# Altium PCB uw_ipmc_zynq.PcbDoc (part 2 of 3)
Units mil, origin at the board's own origin, x right, y up, seen from the top; angles counter-clockwise.
Board outline 3228.35 x 1181.1 mil, 10 copper layers (Component Side, Ground Plane 1 (GND), Inner Layer 1, Inner Layer 2, Power Plane 1, Power Plane 2, Inner Layer 3, Inner Layer 4, Power Plane 3, Solder Side), stack 39.78 mil thick; 400 components, 397 nets, 1698 pads, 375 vias.
Unrouted connection lines stored in the file: 685.
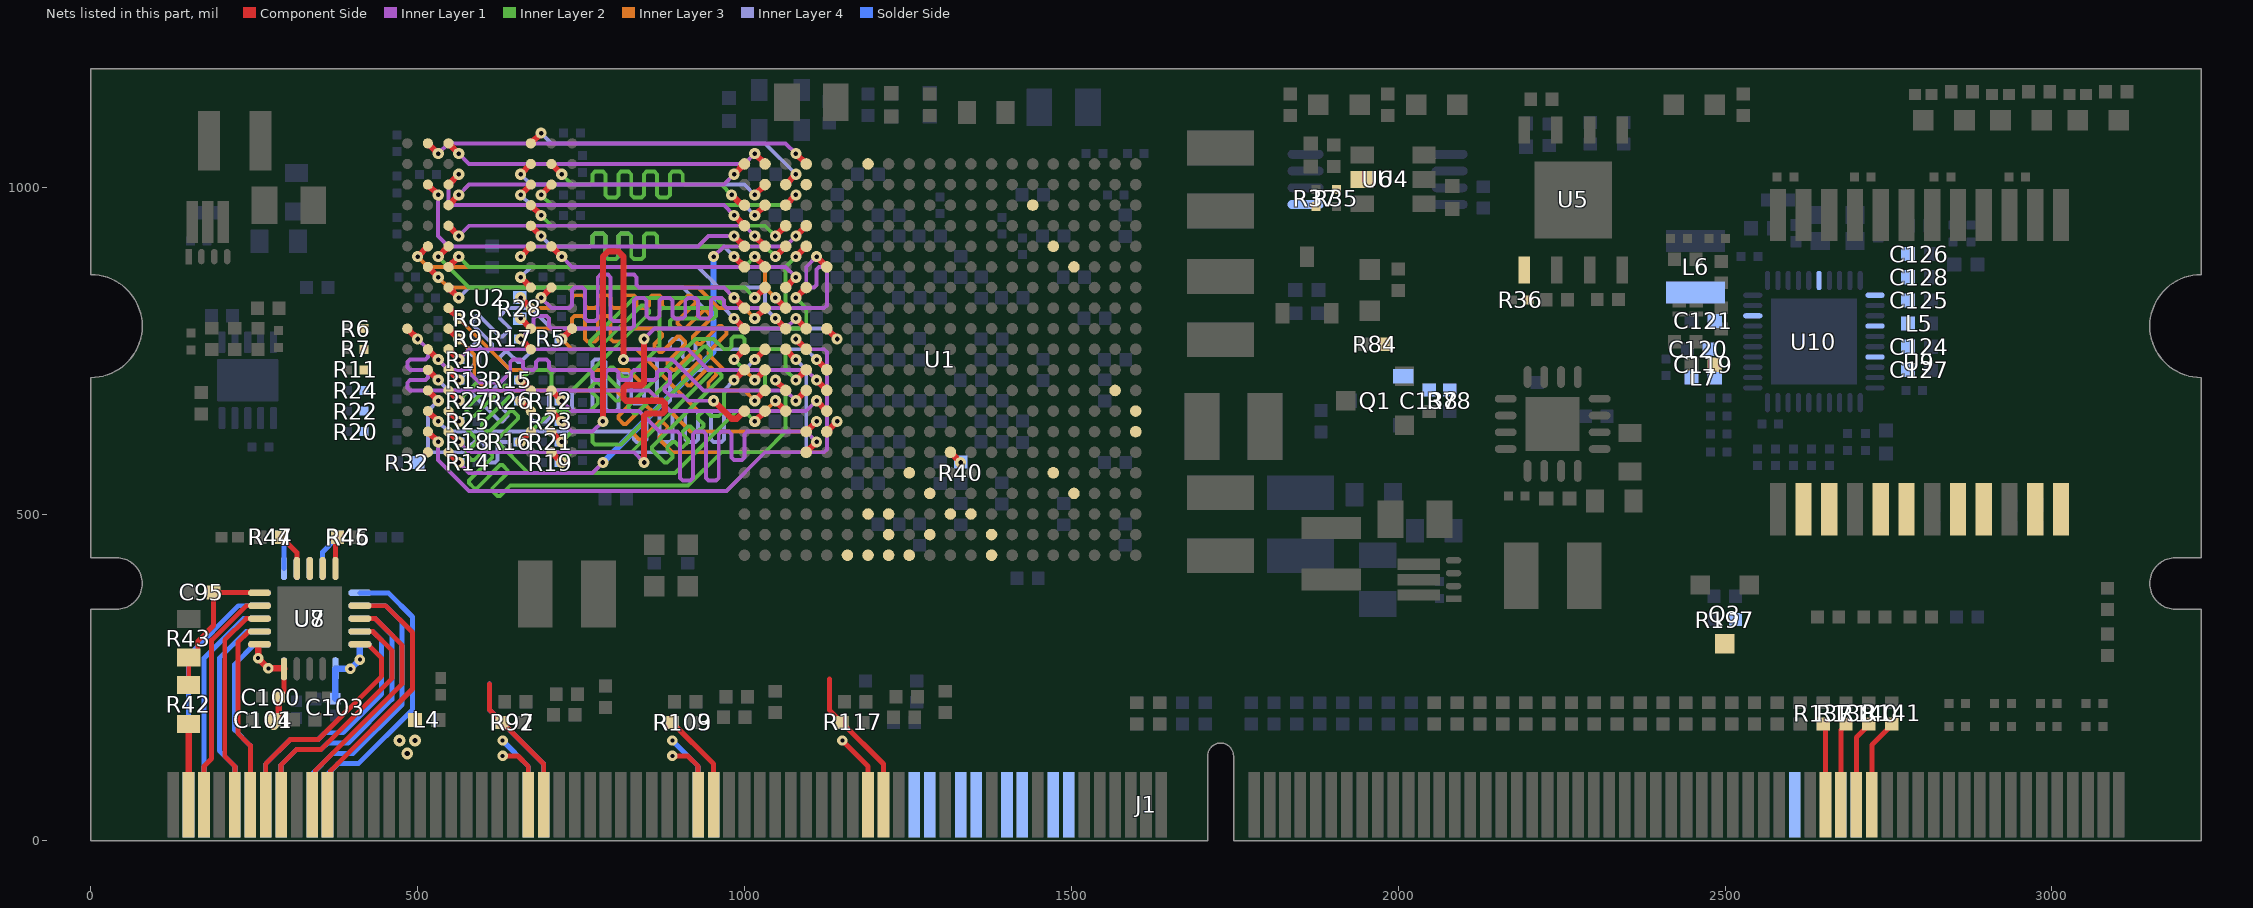
[diagram p10: the nets of this part, all layers, seen from the top]

## Footprints (in the part's own frame and the unit in brackets; to place one, negate y for a bottom-side part, rotate by r counter-clockwise, add the part's x,y. Pads: shape width x height; smd on the part's side, far side on the other; paste and mask are expansions set on the pad) (continued)
MINIDIMM244 [mm] "244-pin miniDIMM pads"
  rect 0.45x2.55 smd: 1(0,0) 2(0.6,0) 3(1.2,0) 4(1.8,0) 5(2.4,0) 6(3,0) 7(3.6,0) 8(4.2,0) 9(4.8,0) 10(5.4,0) 11(6,0) 12(6.6,0) 13(7.2,0) 14(7.8,0) 15(8.4,0) 16(9,0) 17(9.6,0) 18(10.2,0) 19(10.8,0) 20(11.4,0) 21(12,0) 22(12.6,0) 23(13.2,0) 24(13.8,0) 25(14.4,0) 26(15,0) 27(15.6,0) 28(16.2,0) 29(16.8,0) 30(17.4,0) 31(18,0) 32(18.6,0) 33(19.2,0) 34(19.8,0) 35(20.4,0) 36(21,0) 37(21.6,0) 38(22.2,0) 39(22.8,0) 40(23.4,0) 41(24,0) 42(24.6,0) 43(25.2,0) 44(25.8,0) 45(26.4,0) 46(27,0) 47(27.6,0) 48(28.2,0) 49(28.8,0) 50(29.4,0) 51(30,0) 52(30.6,0) 53(31.2,0) 54(31.8,0) 55(32.4,0) 56(33,0) 57(33.6,0) 58(34.2,0) 59(34.8,0) 60(35.4,0) 61(36,0) 62(36.6,0) 63(37.2,0) 64(37.8,0) 65(38.4,0) 66(42,0) 67(42.6,0) 68(43.2,0) 69(43.8,0) 70(44.4,0) 71(45,0) 72(45.6,0) 73(46.2,0) 74(46.8,0) 75(47.4,0) 76(48,0) 77(48.6,0) 78(49.2,0) 79(49.8,0) 80(50.4,0) 81(51,0) 82(51.6,0) 83(52.2,0) 84(52.8,0) 85(53.4,0) 86(54,0) 87(54.6,0) 88(55.2,0) 89(55.8,0) 90(56.4,0) 91(57,0) 92(57.6,0) 93(58.2,0) 94(58.8,0) 95(59.4,0) 96(60,0) 97(60.6,0) 98(61.2,0) 99(61.8,0) 100(62.4,0) 101(63,0) 102(63.6,0) 103(64.2,0) 104(64.8,0) 105(65.4,0) 106(66,0) 107(66.6,0) 108(67.2,0) 109(67.8,0) 110(68.4,0) 111(69,0) 112(69.6,0) 113(70.2,0) 114(70.8,0) 115(71.4,0) 116(72,0) 117(72.6,0) 118(73.2,0) 119(73.8,0) 120(74.4,0) 121(75,0) 122(75.6,0)
  rect 0.45x2.55 smd far side: 123(0,0) 124(0.6,0) 125(1.2,0) 126(1.8,0) 127(2.4,0) 128(3,0) 129(3.6,0) 130(4.2,0) 131(4.8,0) 132(5.4,0) 133(6,0) 134(6.6,0) 135(7.2,0) 136(7.8,0) 137(8.4,0) 138(9,0) 139(9.6,0) 140(10.2,0) 141(10.8,0) 142(11.4,0) 143(12,0) 144(12.6,0) 145(13.2,0) 146(13.8,0) 147(14.4,0) 148(15,0) 149(15.6,0) 150(16.2,0) 151(16.8,0) 152(17.4,0) 153(18,0) 154(18.6,0) 155(19.2,0) 156(19.8,0) 157(20.4,0) 158(21,0) 159(21.6,0) 160(22.2,0) 161(22.8,0) 162(23.4,0) 163(24,0) 164(24.6,0) 165(25.2,0) 166(25.8,0) 167(26.4,0) 168(27,0) 169(27.6,0) 170(28.2,0) 171(28.8,0) 172(29.4,0) 173(30,0) 174(30.6,0) 175(31.2,0) 176(31.8,0) 177(32.4,0) 178(33,0) 179(33.6,0) 180(34.2,0) 181(34.8,0) 182(35.4,0) 183(36,0) 184(36.6,0) 185(37.2,0) 186(37.8,0) 187(38.4,0) 188(42,0) 189(42.6,0) 190(43.2,0) 191(43.8,0) 192(44.4,0) 193(45,0) 194(45.6,0) 195(46.2,0) 196(46.8,0) 197(47.4,0) 198(48,0) 199(48.6,0) 200(49.2,0) 201(49.8,0) 202(50.4,0) 203(51,0) 204(51.6,0) 205(52.2,0) 206(52.8,0) 207(53.4,0) 208(54,0) 209(54.6,0) 210(55.2,0) 211(55.8,0) 212(56.4,0) 213(57,0) 214(57.6,0) 215(58.2,0) 216(58.8,0) 217(59.4,0) 218(60,0) 219(60.6,0) 220(61.2,0) 221(61.8,0) 222(62.4,0) 223(63,0) 224(63.6,0) 225(64.2,0) 226(64.8,0) 227(65.4,0) 228(66,0) 229(66.6,0) 230(67.2,0) 231(67.8,0) 232(68.4,0) 233(69,0) 234(69.6,0) 235(70.2,0) 236(70.8,0) 237(71.4,0) 238(72,0) 239(72.6,0) 240(73.2,0) 241(73.8,0) 242(74.4,0) 243(75,0) 244(75.6,0)
QFN40_H [mm] "QFN, 40-Leads, Body 5.00x5.00mm, Pitch 0.40mm, Thermal Pad 3.33x3.33mm, IPC High Density"
  oval 0.75x0.2 smd: 1(-2.375,1.8) 2(-2.375,1.4) 3(-2.375,1) 4(-2.375,0.6) 5(-2.375,0.2) 6(-2.375,-0.2) 7(-2.375,-0.6) 8(-2.375,-1) 9(-2.375,-1.4) 10(-2.375,-1.8) 21(2.375,-1.8) 22(2.375,-1.4) 23(2.375,-1) 24(2.375,-0.6) 25(2.375,-0.2) 26(2.375,0.2) 27(2.375,0.6) 28(2.375,1) 29(2.375,1.4) 30(2.375,1.8)
  oval 0.2x0.75 smd: 11(-1.8,-2.375) 12(-1.4,-2.375) 13(-1,-2.375) 14(-0.6,-2.375) 15(-0.2,-2.375) 16(0.2,-2.375) 17(0.6,-2.375) 18(1,-2.375) 19(1.4,-2.375) 20(1.8,-2.375) 31(1.8,2.375) 32(1.4,2.375) 33(1,2.375) 34(0.6,2.375) 35(0.2,2.375) 36(-0.2,2.375) 37(-0.6,2.375) 38(-1,2.375) 39(-1.4,2.375) 40(-1.8,2.375)
  rect 3.33x3.33 smd: 41(0,0)
  silkscreen extent -3.47,-2.7 2.7,2.7, body extent -2.55,-2.55 2.55,2.55, height 0.8
R0201_IPC_H [mm] "Chip Resistor, 2-Leads, Body 0.60x0.30mm, IPC High Density"
  rect 0.35x0.35 smd: 1(-0.325,0) 2(0.325,0)
  body extent -0.32,-0.17 0.32,0.17, height 0.26
R0402_IPC_H [mm] "Chip Resistor, 2-Leads, Body 1.00x0.50mm, IPC High Density"
  rect 0.5x0.52 smd: 1(-0.415,0) 2(0.415,0)
  body extent -0.53,-0.28 0.53,0.28, height 0.4
R0603 [mm] "Chip Resistor, Body 1.6x0.8mm, IPC High Density"
  rect 0.7x0.9 smd: 1(-0.75,0) 2(0.75,0)
  silkscreen extent -0.2,-0.35 0.2,0.35, body extent -0.85,-0.48 0.85,0.48, height 0.9
SOT23-H [mm] "SOT23, 3-Leads, Body 2.90x2.45mm, Pitch 0.95mm, IPC High Density"
  rect 0.8x0.55 smd: 1(-1.1,0.95) 2(-1.1,-0.95) 3(1.1,0)
  silkscreen extent -1.23,-1.5 0.7,1.9, body extent -0.7,-1.5 0.7,1.5, height 1.1
SOT-23-OT6_L [mm] "SOT23, 6-Leads, Body 2.9x1.7mm, Pitch 0.95mm, Lead Span 2.8mm, IPC High Density"
  rect 0.9x0.65 smd: 1(-1.2,0.95) 2(-1.2,0) 3(-1.2,-0.95) 4(1.2,-0.95) 5(1.2,0) 6(1.2,0.95)
  silkscreen extent -1.33,-1.55 0.35,1.95, body extent -0.9,-1.55 0.9,1.55, height 1.45
SSOT-3_H [mm] "SOT23, 3-Leads, Body 2.92x2.51mm, Pitch 0.95mm, IPC High Density"
  rect 0.75x0.75 smd: 1(-1.145,0.95) 2(-1.145,-0.95) 3(1.145,0)
  silkscreen extent -1.27,-1.55 0.74,2, body extent -0.74,-1.52 0.74,1.53, height 0.93
TSSOP-ST8_L [mm] "TSOP, 8-Leads, Body 3x4.4mm, Pitch 0.65mm, IPC High Density"
  oval 1.4x0.35 smd: 1(-2.8,0.975) 2(-2.8,0.325) 3(-2.8,-0.325) 4(-2.8,-0.975) 5(2.8,-0.975) 6(2.8,-0.325) 7(2.8,0.325) 8(2.8,0.975)
  silkscreen extent -2.92,-1.55 1.7,1.82, body extent -2.25,-1.55 2.25,1.55, height 1.2
V-PDFN-8_H [mm] "SON, 8-Leads, Body 5.00x6.00mm, Pitch 1.27mm, Thermal Pad 3.00x3.00mm, IPC High Density"
  rect 1.05x0.45 smd: 1(-2.72,1.905) 2(-2.72,0.635) 3(-2.72,-0.635) 4(-2.72,-1.905) 5(2.72,-1.905) 6(2.72,-0.635) 7(2.72,0.635) 8(2.72,1.905)
  rect 3x3 smd paste-1.5: 9(0,0)
  silkscreen extent -3.65,-2.7 3.2,2.75, body extent -3.07,-2.55 3.07,2.55, height 0.8
VSON-8_L [mm]
  rect 0.6x0.25 smd mask+0.07: 1(0,1)
  oval 0.6x0.25 smd mask+0.07: 2(0,0.5) 3(0,0) 4(0,-0.5)
  rect 1.64x0.44 smd paste-0.09 mask-0.07: 5(1.35,-0.35) 6(1.35,0.25) 7(1.35,0.85)
  body extent -0.05,-0.75 1.95,1.25, height 1
X2SON-8_H [mm] "SON, 8-Leads, Body 1.40x1.00mm, Pitch 0.35mm, IPC High Density"
  rect 0.53x0.2 smd: 1(-0.335,0.525) 2(-0.335,0.175) 3(-0.335,-0.175) 4(-0.335,-0.525) 5(0.335,-0.525) 6(0.335,-0.175) 7(0.335,0.175) 8(0.335,0.525)
  silkscreen extent -0.86,0.79 -0.76,0.89, body extent -0.53,-0.72 0.53,0.72, height 0.4
XRCGB_F [mm] "Murata XRCGB_F footprint"
  rect 0.75x0.7 smd paste-0.07 mask-0.07: 1(-1232.05,-1242) 2(-1230.7,-1242) 3(-1230.7,-1243.025) 4(-1232.05,-1243.025)
  silkscreen extent -1232.5,-1243.45 -1230.25,-1241.57, body extent -1232.37,-1243.32 -1230.37,-1241.7, height 0.6

## Part data
C1 C2 C31 C32 C34 C76 C95 C119 C121 C122 C124 C125 C126 C127 C128 C129 C130 C140 C145 C146 C147: library part Cap, "Capacitor", Rating=16V, PackageDescription="Chip Capacitor"
C3 C4 C5 C6 C7 C8 C9 C10 C11 C12 C13 C14 C15 C16 C17 C18 C19 C20 C21 C22 C23 C24 C25 C26 C27 C28 C29 C30 C33 C35 C36 C37 C38 C39 C40 C41 C42 C43 C44 C45 C46 C47 C48 C49 C50 C51 C52 C53 C54 C55 C56 C57 C58 C59 C60 C61 C62 C63 C64 C65 C66 C67 C68 C69 C70 C71 C72 C73 C74 C75 C77 C78 C79 C80 C81 C82 C83 C84 C85 C86 C87 C88 C89 C90 C91 C92 C93 C94 C96 C97 C98 C99 C100 C101 C102 C103 C104 C105 C106 C108 C109 C110 C111 C112 C113 C114 C115 C120 C123 C132 C134 C135 C136 C137 C138 C139 C142 C143 C144: library part Cap, "Capacitor", Rating=6.3V, PackageDescription="Chip Capacitor"
C107: library part Cap, "Capacitor", Rating=100V, PackageDescription="Chip Capacitor"
C116 C117 C118: library part Cap, "Capacitor", Rating=25V, PackageDescription="Chip Capacitor"
D1 D2 D3 D4 D5 D6 D7 D8 D9: library part LED, "Light Emitting Diode"
J1: "244-pin miniDIMM pads"
L1 L2 L3 L4 L5 L7: library part Bead, "Bead Inductor", Measuring Frequency=100MHz, Rated Current=300mA, PackageDescription="Chip Inductor"
L6: library part Ind, "Inductor", DC Current=0.94A, DC Resistance=338mOhm, Tolerance=20%, PackageDescription="Chip Inductor"
L8 L9: library part Ind, "Inductor", DC Current=6.7A, DC Resistance=23mOhm, Tolerance=20%, PackageDescription="Chip Inductor"
Q1: "Small Signal MOSFET, -8.0V, -3.7 A, Single P-Channel, SOT-23"
Q2 Q3: "N-Channel   Logic Level Enhancement Mode Field Effect Transistor"
R1 R2 R3 R4 R32 R35 R36 R37 R38 R39 R40 R44 R45 R46 R47 R58 R59 R60 R61 R62 R64 R65 R66 R67 R68 R69 R70 R71 R72 R73 R74 R75 R76 R78 R81 R83 R84 R87 R88 R89 R90 R91 R92 R93 R94 R95 R96 R97 R98 R99 R100 R101 R102 R103 R104 R105 R106 R107 R108 R109 R110 R111 R112 R113 R114 R115 R116 R117 R118 R119 R120 R121 R122 R123 R124 R125 R126 R127 R128 R129 R130 R131 R132 R137 R138 R139 R140 R141 R142 R143 R144 R145 R146 R147 R148 R149 R150 R151 R152 R153 R154 R155 R156 R157 R158 R159 R160 R161 R162 R163 R164 R165 R166 R167 R168 R169 R170 R171 R172 R173 R174 R175 R176 R180 R181 R182 R183 R184 R185 R186 R189 R190 R191 R192 R196 R197 R199 R200 R201 R202 R203 R204 R205 R206 R207 R208 R209 R210 R211 R212 R213 R214 R215 R216 R?: library part Res, "Resistor", Tolerance=5%, PackageDescription="Chip Resistor"
R5 R6 R7 R8 R9 R10 R11 R12 R13 R14 R15 R16 R17 R18 R19 R20 R21 R22 R23 R24 R25 R26 R27 R28 R29 R30 R31 R33 R34 R41 R42 R43 R48 R49 R50 R51 R52 R53 R54 R55 R56 R57 R63 R77 R79 R80 R82 R85 R86 R133 R134 R135 R136 R177 R178 R179 R187 R188 R193 R194 R195 R198: library part Res, "Resistor", Tolerance=1%, PackageDescription="Chip Resistor"
U3: library part CMP-0395-00664-2, "Single Output LDO, 3 A, 2.375 to 3.5 V Input, with DDR Termination, 10-pin SON (DRC), -40 to 85 degC, Green (RoHS & no Sb/Br)", Manufacturer="Texas Instruments", Power Good=TRUE, Rating=Catalog, ComponentLink1Description="Manufacturer URL", ComponentLink1URL=http://www.ti.com/, ComponentLink2Description=Datasheet, ComponentLink2URL=http://www.ti.com/general/docs/lit/getliterature.tsp?genericPartNumber=TPS51200&fileType=pdf, ComponentLink3Description="Package Specification", ComponentLink3URL=http://www.ti.com/litv/pdf/mpds117k, ComponentLink4Description="URL Link1", ComponentLink4URL="Samples URL:http://www.ti.com/product/tps51200#samples", DatasheetVersion=SLUS812, Eco-Plan="Green (RoHS & no Sb/Br)", Iout(Max)(A)=3, Iq(Typ)(mA)=0.5, Mounting Technology="Surface Mount", PackageDescription="10-Pin Plastic Small Outline, Body 3 x 3 mm, Pitch 0.5 mm", PackageReference=DRC0010J, PackageVersion=4204102-3/L, PartNumber=TPS51200DRCR, SubFamily="Single Channel LDO", Vin(Max)(V)=3.5, Vin(Min)(V)=2.3
U4: library part CMP-0165-00270-1, "2K SPI Bus Serial EEPROM with EUI-48 Node Identity, 6-Pin SOT-23, Industrial Temperature, Tape and Reel", Code_IPC=SOT26A-6, DatasheetVersion="revA, Dec-2008", PackageDescription="6-Lead Plastic Small Outline Transistor (OT) [SOT-23]", PackageReference=SOT-23-OT6, PackageVersion="revBB, Aug-2009"
U5: "128Mb, Multiple I/O Serial Flash Memory"
U6: library part CMP-0165-00405-1, "256K SPI Bus Serial EEPROM, 8-Pin TSSOP, Industrial Temperature", Code_JEDEC=MO-153, DatasheetVersion="revF, May-2007", PackageDescription="8-Lead Plastic Thin Shrink Small Outline (ST) - 4.4mm Body [TSSOP]", PackageReference=TSSOP-ST8, PackageVersion="revBB, Aug-2009"
U7 U8: library part CMP-0313-00576-2, "Octal 16-Bit PulSAR Analog-to-Digital Converter with Serial, SPI Interface, 250KSPS, -40 to +85 degC, CP-20-4, Pb-Free, Tube", Generic Part Number=AD7689, Manufacturer="Analog Devices", Channels=8, Code_JEDEC=MO-220-VGGD-1, ComponentLink1Description="Manufacturer URL", ComponentLink1URL=http://www.analog.com/en/index.html, ComponentLink2Description=Datasheet, ComponentLink2URL=http://www.analog.com/static/imported-files/data_sheets/AD7682_7689.pdf, ComponentLink3Description="Package Specification", ComponentLink3URL=http://www.analog.com/static/imported-files/packages/PKG_PDF/LFCSP(CP)/CP_20_4.pdf, ComponentLink4Description="Product URL", ComponentLink4URL=http://www.analog.com/en/analog-to-digital-converters/ad-converters/ad7689/products/product.html, DatasheetVersion=Rev.D, Interface="Ser, SPI", Mounting Technology="Surface Mount", PackageDescription="20-Lead Lead Frame Chip Scale Package [LFCSP_VQ] 4 x 4 mm Body, Very Thin Quad", PackageReference=CP-20-4, PackageVersion=012508-B, Packing=Tube, PartNumber=AD7689BCPZ, Resolution (Bits)=16, RoHS=Y, Throughput Rate (SPS)=250K
U9: "1000Base-T, Single Port Mini-Magnetics Modules"
U10: "Integrated 10/100/1000 Gigabit Ethernet Transceiver"
U11: "2-Bit Bidirectional Voltage-Level Translator for Open-Drain and Push-Pull Applications"
U12 U14: "3-A Step-Down Converter With Hiccup Short-Circuit Protection"
U13: library part CMP-0786-00436-1, "1.2 A, Low VIN, Low Dropout Linear Regulator, 1.6 to 3.6 V Vin, 0.75 to 3 V Vout, Industrial, 16-pin QFN (CP-16-4), Reel", Manufacturer="Analog Devices", Supply Current IGND @ Small Load=90uA, Code_JEDEC=MO-220-VGGC, ComponentLink1Description="Manufacturer URL", ComponentLink1URL=http://www.analog.com/en/index.html, ComponentLink2Description=Datasheet, ComponentLink2URL=http://www.analog.com/static/imported-files/data_sheets/ADP1754_1755.pdf, ComponentLink3Description="Package Specification", ComponentLink3URL=http://www.analog.com/static/imported-files/packages/46009454504174339653421710019CP_16_4.pdf, ComponentLink4Description="URL Link1", ComponentLink4URL="Product URL:http://www.analog.com/en/ADP1755/productSearch.html", DatasheetVersion="Rev. D", Iout max=1.2A, Mounting Technology="Surface Mount", PackageDescription="16-Pin Lead Frame Chip Scale Package, Body 4 x 4 mm, Pitch 0.65 mm", PackageReference=CP-16-4, PackageVersion="010606-0, 01/2006", Packing=Reel, PartNumber=ADP1755ACPZ-R7, Vin (max) (V)=3.6, Vin (min) (V)=1.6, Vout Adjustable Range="0.75V to 3.3V"
U15: "3.3V EconoReset with Pushbutton"
X1: library part "Crystal Osc", "Standard Crystal Oscillator"
Y1: library part CMP-0728-00001-1, "Plastic Package Clock Oscillator, 3.6864 MHz Frequency, 15 pF Output Load, 4-Pin 2.5 x 2 x 0.9 mm SMD, -40 to 85 degC, RoHS, Reel", Disable Stand-by Current="15 uA Max.", Frequency="33.333 MHz", Manufacturer=Abracon, Operating Temperature Range="-40 to 85 degC", Overall Freq.Stability="+/- 50 ppm (STD)", PartNumber=ASDMB-3.6864MHZ-LC-T, Supply Voltage="1.8 to 3.3 V", ComponentLink1Description="Manufacturer URL", ComponentLink1URL=http://www.abracon.com/, ComponentLink2Description=Datasheet, ComponentLink2URL=http://www.abracon.com/Oscillators/ASDMB.pdf, ComponentLink3Description="Package Specification", ComponentLink3URL=http://www.abracon.com/Oscillators/ASDMB.pdf, DatasheetVersion=Oct-13, Disable Time="20 ns Typ.", Mounting Technology="Surface Mount", Output Load="15 pF", PackageDescription="4-Pin SMD, Body 2.5 x 2 mm, Height 0.9 mm", PackageReference=ASDMB-4, PackageVersion=Oct-13, Packing=Reel, RoHS=TRUE, Startup Time="1.5 ms Typ."

## Via types
v1: diameter 17, hole 7, Component Side to Solder Side, 274 vias
v2: diameter 16, hole 6, Component Side to Solder Side, 42 vias
v3: diameter 19.68, hole 7.87, Component Side to Solder Side, 35 vias
v4: diameter 18, hole 8, Component Side to Solder Side, 24 vias

## Nets (pads, with @x,y where several pads share a name; then routed paths per layer and width w, separated by ;. In a path a pad name is that pad's centre, name@x,y a point inside that pad or via, vN(x,y) a via of type N, cw(c..) or ccw(c..) an arc to the next point about the centre after c; other vN are vias at no path point)
+12V_SENSE: J1.2 R42.1 | length 124
  Component Side w10: J1.2@149.61,55.12 R42.1@149.61,179.13
\ADC-A_SPI_CS: R45.1 U1.V7 U7.11 | length 49
  Component Side w7.5: U7.11@374.37,416.77 374.37,461.57 R45.1@377.36,464.57
\ADC-B_SPI_CS: R47.1 U1.Y6 U8.11 | length 49.3
  Solder Side w7.5: R47.1@291.93,464.57 295.63,460.87 U8.11@295.63,416.77
\ENABLE_0: J1.25 R92.2 U1.W10 | length 219.3
  Component Side w7.5: 610.24,240.16 610.24,200.2 R92.2@629.33,181.1 692.91,117.52 J1.25@692.91,55.12
\ENABLE_1: J1.147 R97.2 U1.V11 | length 219.3
  Solder Side w7.5: 610.24,240.16 610.24,200.2 R97.2@629.33,181.1 692.91,117.52 J1.147@692.91,55.12
\ENABLE_2: J1.36 R103.2 U1.W13 | length 152.3
  Component Side w7.5: R103.2@889.17,181.1 952.76,117.52 J1.36@952.76,55.12
\ENABLE_3: J1.158 R109.2 U1.U17
\ENABLE_4: J1.47 R117.2 U1.P20 | length 227.2
  Component Side w7.5: 1129.92,248.03 1129.92,200.2 R117.2@1149.02,181.1 1212.6,117.52 J1.47@1212.6,55.12
\PS1_0: J1.24 U1.W8 | length 104.9
  Component Side w7.5: v2(629.92,129.92) 653.54,129.92 669.29,114.17 J1.24@669.29,55.12
\PS1_1: J1.146 U1.Y13 | length 114.7
  Solder Side w7.5: v2(629.92,153.54) 669.29,114.17 J1.146@669.29,55.12
\PS1_2: J1.35 U1.V12 | length 104.9
  Component Side w7.5: v2(889.76,129.92) 913.39,129.92 929.13,114.17 J1.35@929.13,55.12
\PS1_3: J1.157 U1.T16 | length 114.7
  Solder Side w7.5: v2(889.76,153.54) 929.13,114.17 J1.157@929.13,55.12
\PS1_4: J1.46 U1.N20 | length 114.7
  Component Side w7.5: v2(1149.61,153.54) 1188.98,114.17 J1.46@1188.98,55.12
\QSPI_S: R36.2 U1.A7 U5.1
\SPI_CS0: R35.2 U1.C15 U4.5
\SPI_CS1: R37.2 U1.E16 U6.1
ADC-A_IN0: C95.2 R42.2 R43.2 U7.16 | length 230.7
  Component Side w7.5: R42.2@149.61,238.19 150,238.58 R43.2@150,280.47 153.94,280.47 163.72,290.25 163.72,305.45 187.72,329.45 C95.2@187.72,380 188.03,379.69 257.91,379.69 U7.16@258.23,379.37
ADC-A_IN1: J1.3 U7.17 | length 351.8
  Component Side w7.5: J1.3@173.23,55.12 173.23,114.17 185,125.94 185,307.05 237.64,359.69 U7.17@258.23,359.69
ADC-A_IN2: J1.5 U7.18 | length 325.4
  Component Side w7.5: J1.5@220.47,55.12 220.47,114.17 205,129.65 205,307.36 237.64,340 U7.18@258.23,340
ADC-A_IN3: J1.6 U7.19 | length 296.6
  Component Side w7.5: J1.6@244.09,55.12 244.09,145.67 225,164.76 225,303.74 241.57,320.32 U7.19@258.23,320.32
ADC-A_IN4: J1.7 U7.6 | length 373.9
  Component Side w7.5: J1.7@267.72,55.12 267.72,117.72 305,155 347.91,155 444.88,251.97 444.88,279.53 423.78,300.63 U7.6@411.77,300.63 403.83,300.63 U7.6@402.98,299.78
ADC-A_IN5: J1.8 U7.7 | length 389.2
  Component Side w7.5: J1.8@291.34,55.12 291.34,116.34 315,140 352.6,140 460.63,248.03 460.63,291.34 431.65,320.32 U7.7@411.77,320.32
ADC-A_IN6: J1.10 U7.8 | length 382.7
  Component Side w7.5: J1.10@338.58,55.12 343.44,59.98 343.44,107.22 476.38,240.16 476.38,299.21 435.59,340 U7.8@411.77,340
ADC-A_IN7: J1.11 U7.9 | length 414.8
  Component Side w7.5: J1.11@362.2,55.12 367.06,59.98 367.06,107.22 492.13,232.28 492.13,318.9 451.34,359.69 U7.9@411.77,359.69
ADC-A_SPI_CLK: U1.T9 U7.13
ADC-A_SPI_MISO: R44.1 U1.Y7 U7.14 | length 57.5
  Component Side w7.5: R44.1@291.93,464.57 315.31,441.18 U7.14@315.31,416.77
ADC-A_SPI_MOSI: U1.U10 U7.12
ADC-B_IN0: J1.124 U8.9 | length 368.5
  Solder Side w7.5: J1.124@149.61,55.12 149.61,283.46 225.83,359.68 U8.9@258.23,359.68
ADC-B_IN1: J1.125 U8.8 | length 334.5
  Solder Side w7.5: J1.125@173.23,55.12 173.23,279.53 233.7,340 U8.8@258.23,340
ADC-B_IN2: J1.127 U8.7 | length 312.5
  Solder Side w7.5: J1.127@220.47,55.12 220.47,114.17 196.85,137.8 196.85,279.53 237.64,320.31 U8.7@258.23,320.31
ADC-B_IN3: J1.128 U8.6 | length 275.9
  Solder Side w7.5: J1.128@244.09,55.12 244.09,145.67 220,169.76 220,270.19 250.44,300.63 U8.6@258.23,300.63
ADC-B_IN4: J1.129 U8.19 | length 405.2
  Solder Side w7.5: J1.129@267.72,55.12 267.72,117.72 305,155 347.91,155 358.27,165.35 385.83,165.35 444.88,224.41 444.88,307.09 431.65,320.31 U8.19@411.77,320.31
ADC-B_IN5: J1.130 U8.18 | length 429.7
  Solder Side w7.5: J1.130@291.34,55.12 291.34,116.34 315,140 352.6,140 362.2,149.61 393.7,149.61 460.63,216.54 460.63,314.96 435.59,340 U8.18@411.77,340
ADC-B_IN6: J1.132 U8.17 | length 430
  Solder Side w7.5: J1.132@338.58,55.12 338.58,102.36 370.08,133.86 401.57,133.86 476.38,208.66 476.38,334.65 451.34,359.68 U8.17@411.77,359.68
ADC-B_IN7: J1.133 U8.16 | length 457.7
  Solder Side w7.5: J1.133@362.2,55.12 365.47,58.38 365.47,98.6 362.2,101.87 378.45,118.11 409.45,118.11 492.13,200.79 492.13,342.52 455.28,379.37 U8.16@411.77,379.37
ADC-B_SPI_CLK: U1.Y9 U8.13
ADC-B_SPI_MISO: R46.1 U1.V8 U8.14 | length 57.2
  Solder Side w7.5: U8.14@354.69,416.77 354.69,441.89 R46.1@377.36,464.57
ADC-B_SPI_MOSI: U1.Y8 U8.12
ALARM_A: J1.226 U1.F17
ALARM_B: J1.227 U1.M19
ATCA_BLUE_LED: J1.103 R137.1 | length 123.6
  Component Side w7.5: R137.1@2650,177.28 2653.54,173.74 J1.103@2653.54,55.12
ATCA_LED1: J1.104 R138.1 | length 125.4
  Component Side w7.5: J1.104@2677.17,55.12 2677.17,169.45 R138.1@2685,177.28
ATCA_LED2: J1.105 R140.1 | length 130.1
  Component Side w7.5: J1.105@2700.79,55.12 2700.79,158.07 R140.1@2720,177.28
ATCA_LED3: J1.106 R141.1 | length 134.8
  Component Side w7.5: J1.106@2724.41,55.12 2724.41,146.69 R141.1@2755,177.28
AVCC3.3: C100.2 C101.2 C103.2 C104.2 L4.2 U7.1 U7.20 U8.1 U8.20 | length 272.9
  Component Side w7.5: C100.2@287.8,220 295.63,227.83 U7.1@295.63,263.23
  Component Side w10: U7.20@258.23,300.63 255.9,298.31 v2(255.91,279.53) v2(271.65,263.78) 295.08,263.78 U7.1@295.63,263.23 ; v2(280.12,177.76) C101.2@280.12,185.04 287.8,192.72 C100.2@287.8,220
  Solder Side w10: C103.2@374.02,217.52 374.37,217.87 U8.1@374.37,263.23 v2(397.09,263.23) 397.8,263.23 v2(411.77,277.2) U8.20@411.77,300.63
  other v4: 484.25,133.86 472.44,153.54 496.06,153.54
AVDD33: C124.2 C125.2 L5.1 U10.14
AVDDL: C126.2 C127.2 C128.2 L7.2 U10.6 U10.11 U10.17
DDR3_A0: R27.1 U1.N2 U2.N3 | length 914.3
  Component Side w9.5: U2.N3@547.24,688.98 v1(562.99,673.23) ; v1(1015.75,641.73) U1.N2@1031.5,657.48
  Inner Layer 2 w6: v1(562.99,673.23) 594.49,704.72 598.43,704.72 606.3,696.85 606.3,692.91 574.8,661.42 574.8,657.48 582.68,649.61 586.61,649.61 633.86,696.85 637.8,696.85 645.67,688.98 645.67,685.04 598.43,637.8 598.43,633.86 606.3,625.98 610.24,625.98 641.73,657.48 645.67,657.48 653.54,649.61 653.54,645.67 629.92,622.05 622.05,614.17 622.05,610.24 669.29,562.99 893.7,562.99 988.19,657.48 1000,657.48 v1(1015.75,641.73)
DDR3_A1: R26.1 U1.K2 U2.P7 | length 915.3
  Component Side w9.5: v1(657.48,673.23) U2.P7@673.23,657.48 ; v1(1015.75,736.22) U1.K2@1031.5,751.97
  Inner Layer 4 w6: v1(657.48,673.23) 673.23,657.48 673.23,645.67 677.17,641.73 696.85,641.73 700.79,645.67 700.79,685.04 704.72,688.98 732.28,688.98 736.22,685.04 736.22,661.42 740.16,657.48 763.78,657.48 767.72,661.42 767.72,732.28 771.65,736.22 783.46,736.22 787.4,732.28 787.4,661.42 791.34,657.48 803.15,657.48 807.09,661.42 807.09,712.6 811.02,716.54 822.83,716.54 826.77,712.6 826.77,673.23 830.71,669.29 842.52,669.29 846.46,673.23 846.46,732.28 850.39,736.22 862.2,736.22 866.14,732.28 866.14,673.23 870.08,669.29 881.89,669.29 885.83,673.23 885.83,716.54 889.76,720.47 1000,720.47 v1(1015.75,736.22)
DDR3_A2: R25.1 U1.M3 U2.P3 | length 923.7
  Component Side w9.5: U2.P3@547.24,657.48 v1(562.99,641.73) ; v1(1047.24,704.72) U1.M3@1062.99,688.98
  Inner Layer 2 w6: v1(562.99,641.73) 590.55,614.17 590.55,610.24 574.8,594.49 574.8,590.55 582.68,582.68 586.61,582.68 602.36,598.43 606.3,598.43 614.17,590.55 614.17,586.61 578.74,551.18 578.74,547.24 586.61,539.37 590.55,539.37 625.98,574.8 629.92,574.8 637.8,566.93 637.8,562.99 614.17,539.37 614.17,535.43 622.05,527.56 625.98,527.56 641.73,543.31 913.39,543.31 964.57,594.49 1031.5,594.49 1062.99,625.98 1062.99,688.98 v1(1047.24,704.72)
DDR3_A3: R24.1 U1.K3 U2.N2 | length 928.2
  Component Side w9.5: U2.N2@515.75,688.98 v1(531.5,673.23) ; U1.K3@1062.99,751.97 v1(1078.74,736.22)
  Inner Layer 4 w6: v1(531.5,673.23) 515.75,657.48 515.75,598.43 519.68,594.49 578.74,594.49 582.68,598.43 582.68,606.3 586.61,610.24 598.43,610.24 602.36,606.3 602.36,582.68 606.3,578.74 618.11,578.74 622.05,582.68 622.05,606.3 625.98,610.24 637.8,610.24 641.73,606.3 641.73,598.43 645.67,594.49 1090.55,594.49 1094.49,598.43 1094.49,720.47 v1(1078.74,736.22)
DDR3_A4: R23.1 U1.M4 U2.P8 | length 857.9
  Component Side w9.5: U2.P8@704.72,657.48 v1(720.47,641.73) ; v1(783.46,641.73) 783.46,893.7 791.34,901.57 807.09,901.57 814.96,893.7 v1(814.96,736.22) ; v1(1078.74,673.23) U1.M4@1094.49,688.98
  Inner Layer 1 w6: v1(720.47,641.73) 736.22,625.98 767.72,625.98 v1(783.46,641.73) ; v1(814.96,736.22) 889.76,736.22 937.01,688.98 1062.99,688.98 v1(1078.74,673.23)
DDR3_A5: R22.1 U1.L1 U2.P2 | length 853.7
  Component Side w9.5: U2.P2@515.75,657.48 v1(531.5,641.73) ; v1(984.25,704.72) U1.L1@1000,720.47
  Inner Layer 4 w6: v1(531.5,641.73) 547.24,625.98 826.77,625.98 830.71,622.05 830.71,614.17 834.65,610.24 846.46,610.24 850.39,614.17 850.39,653.54 854.33,657.48 866.14,657.48 870.08,653.54 870.08,614.17 874.02,610.24 885.83,610.24 889.76,614.17 889.76,653.54 893.7,657.48 905.51,657.48 909.45,653.54 909.45,614.17 913.39,610.24 925.2,610.24 929.13,614.17 929.13,653.54 933.07,657.48 944.88,657.48 948.82,653.54 948.82,614.17 952.76,610.24 964.57,610.24 968.5,614.17 968.5,688.98 v1(984.25,704.72)
DDR3_A6: R21.1 U1.L4 U2.R8 | length 905
  Component Side w9.5: U2.R8@704.72,625.98 v1(720.47,610.24) ; v1(1078.74,704.72) U1.L4@1094.49,720.47
  Inner Layer 2 w6: v1(720.47,610.24) 736.22,625.98 763.78,625.98 767.72,622.05 767.72,610.24 771.65,606.3 811.02,606.3 948.82,744.09 948.82,748.03 940.94,755.91 937.01,755.91 834.65,653.54 830.71,653.54 822.83,661.42 822.83,665.35 925.2,767.72 952.76,767.72 968.5,751.97 976.38,751.97 980.31,755.91 980.31,767.72 984.25,771.65 996.06,771.65 1000,767.72 1000,755.91 1003.94,751.97 1059.06,751.97 1062.99,748.03 1062.99,720.47 v1(1078.74,704.72)
DDR3_A7: R20.1 U1.K4 U2.R2 | length 917.3
  Component Side w9.5: U2.R2@515.75,625.98 v1(531.5,610.24) ; v1(1078.74,767.72) U1.K4@1094.49,751.97
  Inner Layer 1 w6: v1(531.5,610.24) 531.5,582.68 578.74,535.43 972.44,535.43 1031.5,594.49 1122.05,594.49 1125.98,598.43 1125.98,748.03 1122.05,751.97 1094.49,751.97 v1(1078.74,767.72)
DDR3_A8: R19.1 U1.K1 U2.T8 | length 913.3
  Component Side w9.5: U2.T8@704.72,594.49 v1(720.47,578.74) ; v1(984.25,736.22) U1.K1@1000,751.97
  Inner Layer 2 w6: v1(720.47,578.74) 736.22,594.49 826.77,594.49 952.76,720.47 956.69,720.47 964.57,712.6 964.57,708.66 858.27,602.36 858.27,598.43 866.14,590.55 877.95,578.74 881.89,578.74 889.76,586.61 889.76,590.55 881.89,598.43 881.89,602.36 889.76,610.24 893.7,610.24 901.57,602.36 905.51,602.36 913.39,610.24 913.39,614.17 905.51,622.05 905.51,625.98 913.39,633.86 917.32,633.86 925.2,625.98 929.13,625.98 937.01,633.86 937.01,637.8 929.13,645.67 929.13,649.61 937.01,657.48 940.94,657.48 948.82,649.61 960.63,649.61 968.5,657.48 968.5,685.04 972.44,688.98 1027.56,688.98 1031.5,692.91 1031.5,716.54 1027.56,720.47 1000,720.47 v1(984.25,736.22)
DDR3_A9: R18.1 U1.J4 U2.R3 | length 887.5
  Component Side w9.5: U2.R3@547.24,625.98 v1(562.99,610.24) ; v1(846.46,578.74) 846.46,649.61 850.39,653.54 874.02,653.54 877.95,657.48 877.95,669.29 874.02,673.23 818.9,673.23 814.96,677.17 814.96,692.91 818.9,696.85 842.52,696.85 846.46,700.79 v1(846.46,767.72) ; v1(1078.74,799.21) U1.J4@1094.49,783.46
  Inner Layer 1 w6: v1(562.99,610.24) 578.74,594.49 830.71,594.49 v1(846.46,578.74) ; v1(846.46,767.72) 862.2,783.46 1062.99,783.46 v1(1078.74,799.21)
DDR3_A10: R17.1 U1.F5 U2.L7 | length 933
  Component Side w9.5: v1(657.48,767.72) U2.L7@673.23,751.97 ; v1(1110.24,893.7) U1.F5@1125.98,877.95
  Inner Layer 1 w6: v1(657.48,767.72) 677.17,787.4 677.17,799.21 681.1,803.15 696.85,803.15 700.79,799.21 700.79,787.4 704.72,783.46 826.77,783.46 830.71,787.4 830.71,826.77 834.65,830.71 846.46,830.71 850.39,826.77 850.39,803.15 854.33,799.21 866.14,799.21 870.08,803.15 870.08,826.77 874.02,830.71 885.83,830.71 889.76,826.77 889.76,803.15 893.7,799.21 905.51,799.21 909.45,803.15 909.45,826.77 913.39,830.71 925.2,830.71 929.13,826.77 929.13,803.15 933.07,799.21 944.88,799.21 948.82,803.15 948.82,826.77 952.76,830.71 964.57,830.71 968.5,826.77 968.5,818.9 972.44,814.96 1122.05,814.96 1125.98,818.9 1125.98,874.02 1122.05,877.95 1114.17,877.95 1110.24,874.02 1110.24,850.39 1106.3,846.46 1098.43,846.46 1094.49,850.39 1094.49,877.95 v1(1110.24,893.7)
DDR3_A11: R16.1 U1.G4 U2.R7 | length 940.2
  Component Side w9.5: v1(657.48,610.24) U2.R7@673.23,625.98 ; v1(1078.74,830.71) U1.G4@1094.49,846.46
  Inner Layer 2 w6: v1(657.48,610.24) 704.72,657.48 763.78,657.48 775.59,669.29 775.59,677.17 763.78,688.98 763.78,692.91 771.65,700.79 775.59,700.79 803.15,673.23 807.09,673.23 814.96,681.1 814.96,685.04 787.4,712.6 787.4,716.54 795.28,724.41 799.21,724.41 814.96,708.66 822.83,708.66 870.08,755.91 870.08,811.02 874.02,814.96 952.76,814.96 956.69,811.02 956.69,803.15 952.76,799.21 889.76,799.21 885.83,795.28 885.83,787.4 889.76,783.46 1090.55,783.46 1094.49,787.4 1094.49,814.96 v1(1078.74,830.71)
DDR3_A12: R15.1 U1.E4 U2.N7 | length 872.8
  Component Side w9.5: v1(657.48,704.72) U2.N7@673.23,688.98 ; v1(1078.74,893.7) U1.E4@1094.49,909.45
  Inner Layer 2 w6: v1(657.48,704.72) 673.23,720.47 700.79,720.47 704.72,716.54 704.72,692.91 708.66,688.98 736.22,688.98 854.33,807.09 854.33,811.02 846.46,818.9 842.52,818.9 775.59,751.97 771.65,751.97 763.78,759.84 763.78,763.78 830.71,830.71 956.69,830.71 972.44,814.96 1059.06,814.96 1062.99,818.9 1062.99,877.95 v1(1078.74,893.7)
DDR3_A13: R14.1 U1.D4 U2.T3 | length 802.2
  Component Side w9.5: U2.T3@547.24,594.49 v1(562.99,578.74) ; v1(1078.74,925.2) U1.D4@1094.49,940.94
  Inner Layer 1 w6: v1(562.99,578.74) 578.74,562.99 767.72,562.99 v1(783.46,578.74) ; v1(952.76,893.7) 968.5,909.45 1062.99,909.45 v1(1078.74,925.2)
  Solder Side w9.5: v1(783.46,578.74) 952.76,748.03 v1(952.76,893.7)
DDR3_BA0: R11.1 U1.L5 U2.M2 | length 886.5
  Component Side w9.5: U2.M2@515.75,720.47 v1(531.5,704.72) ; v1(1110.24,736.22) U1.L5@1125.98,720.47
  Inner Layer 4 w6: v1(531.5,704.72) 547.24,688.98 578.74,688.98 625.98,641.73 629.92,641.73 637.8,649.61 637.8,653.54 610.24,681.1 610.24,685.04 641.73,716.54 641.73,720.47 625.98,736.22 625.98,740.16 633.86,748.03 637.8,748.03 653.54,732.28 657.48,732.28 677.17,751.97 881.89,751.97 885.83,755.91 885.83,763.78 889.76,767.72 901.57,767.72 905.51,763.78 905.51,740.16 909.45,736.22 921.26,736.22 925.2,740.16 925.2,763.78 929.13,767.72 940.94,767.72 944.88,763.78 944.88,755.91 948.82,751.97 1094.49,751.97 v1(1110.24,736.22)
DDR3_BA1: R12.1 U1.R4 U2.N8 | length 818.6
  Component Side w9.5: U2.N8@704.72,688.98 v1(720.47,673.23) ; U1.R4@1094.49,594.49 v1(1110.24,610.24)
  Inner Layer 1 w6: v1(720.47,673.23) 736.22,657.48 838.58,657.48 870.08,625.98 897.64,625.98 901.57,622.05 901.57,555.12 905.51,551.18 917.32,551.18 921.26,555.12 921.26,622.05 925.2,625.98 937.01,625.98 940.94,622.05 940.94,555.12 944.88,551.18 956.69,551.18 960.63,555.12 960.63,622.05 964.57,625.98 976.38,625.98 980.31,622.05 980.31,586.61 984.25,582.68 996.06,582.68 1000,586.61 1000,622.05 1003.94,625.98 1094.49,625.98 v1(1110.24,610.24)
DDR3_BA2: R13.1 U1.J5 U2.M3 | length 854
  Component Side w9.5: U2.M3@547.24,720.47 v1(562.99,704.72) ; U1.J5@1125.98,783.46 v1(1141.73,767.72)
  Inner Layer 4 w6: v1(562.99,704.72) 590.55,732.28 590.55,736.22 578.74,748.03 578.74,751.97 586.61,759.84 590.55,759.84 602.36,748.03 606.3,748.03 614.17,755.91 614.17,759.84 582.68,791.34 582.68,795.28 590.55,803.15 594.49,803.15 625.98,771.65 629.92,771.65 641.73,783.46 625.98,799.21 625.98,803.15 637.8,814.96 673.23,814.96 704.72,783.46 1125.98,783.46 v1(1141.73,767.72)
DDR3_CAS#: R9.1 U1.P5 U2.K3 | length 921.2
  Component Side w9.5: U2.K3@547.24,783.46 v1(562.99,767.72) ; U1.P5@1125.98,625.98 v1(1141.73,641.73)
  Inner Layer 3 w6: v1(562.99,767.72) 586.61,744.09 586.61,708.66 606.3,688.98 803.15,688.98 822.83,669.29 822.83,665.35 807.09,649.61 807.09,645.67 814.96,637.8 818.9,637.8 846.46,665.35 850.39,665.35 858.27,657.48 858.27,653.54 830.71,625.98 830.71,622.05 838.58,614.17 842.52,614.17 870.08,641.73 874.02,641.73 881.89,633.86 881.89,629.92 870.08,618.11 870.08,614.17 889.76,594.49 1122.05,594.49 1125.98,598.43 1125.98,625.98 v1(1141.73,641.73)
DDR3_CK_N: R28.1 U1.M2 U2.K7 | length 832.9
  Component Side w9.5: v1(657.48,799.21) U2.K7@673.23,783.46 ; v1(1015.75,673.23) U1.M2@1031.5,688.98
  Inner Layer 3 w6: v1(657.48,799.21) 673.23,783.46 732.28,783.46 736.22,787.4 736.22,799.21 740.16,803.15 751.97,803.15 755.91,799.21 755.91,767.72 759.84,763.78 771.65,763.78 775.59,767.72 775.59,799.21 779.53,803.15 791.34,803.15 795.28,799.21 795.28,767.72 799.21,763.78 811.02,763.78 814.96,767.72 814.96,779.53 818.9,783.46 866.14,783.46 874.02,775.59 874.02,771.65 862.2,759.84 862.2,755.91 870.08,748.03 874.02,748.03 897.64,771.65 901.57,771.65 909.45,763.78 909.45,759.84 881.89,732.28 881.89,728.35 889.76,720.47 893.7,720.47 921.26,748.03 925.2,748.03 933.07,740.16 933.07,736.22 905.51,708.66 905.51,704.72 913.39,696.85 917.32,696.85 944.88,724.41 948.82,724.41 956.69,716.54 956.69,712.6 944.88,700.79 944.88,692.91 948.82,688.98 1000,688.98 v1(1015.75,673.23)
DDR3_CK_P: R28.2 U1.L2 U2.J7 | length 816.7
  Component Side w9.5: v1(657.48,830.71) U2.J7@673.23,814.96 ; v1(1015.75,704.72) U1.L2@1031.5,720.47
  Inner Layer 3 w6: v1(657.48,830.71) 673.23,814.96 732.28,814.96 736.22,818.9 736.22,830.71 740.16,834.65 751.97,834.65 755.91,830.71 755.91,818.9 759.84,814.96 771.65,814.96 775.59,818.9 775.59,830.71 779.53,834.65 791.34,834.65 795.28,830.71 795.28,818.9 799.21,814.96 811.02,814.96 814.96,818.9 814.96,830.71 818.9,834.65 830.71,834.65 834.65,830.71 834.65,818.9 838.58,814.96 850.39,814.96 854.33,818.9 854.33,830.71 858.27,834.65 870.08,834.65 874.02,830.71 874.02,818.9 877.95,814.96 893.7,814.96 913.39,834.65 917.32,834.65 925.2,826.77 925.2,822.83 897.64,795.28 897.64,791.34 905.51,783.46 909.45,783.46 937.01,811.02 940.94,811.02 948.82,803.15 948.82,799.21 921.26,771.65 921.26,767.72 929.13,759.84 933.07,759.84 960.63,787.4 964.57,787.4 972.44,779.53 972.44,775.59 944.88,748.03 944.88,744.09 968.5,720.47 1000,720.47 v1(1015.75,704.72)
DDR3_CKE: R5.1 U1.N3 U2.K9 | length 423.5
  Component Side w9.5: v1(720.47,767.72) U2.K9@736.22,783.46 ; v1(1047.24,673.23) U1.N3@1062.99,657.48
  Inner Layer 3 w6: v1(720.47,767.72) 736.22,751.97 834.65,751.97 929.13,657.48 1031.5,657.48 v1(1047.24,673.23)
DDR3_CS#: R7.1 U1.N1 U2.L2 | length 692.7
  Component Side w9.5: U2.L2@515.75,751.97 v1(531.5,736.22) ; v1(952.76,673.23) 980.31,645.67 988.19,645.67 U1.N1@1000,657.48
  Inner Layer 1 w6: v1(531.5,736.22) 547.24,720.47 574.8,720.47 594.49,700.79 625.98,700.79 641.73,716.54 641.73,732.28 645.67,736.22 657.48,736.22 661.42,732.28 661.42,724.41 665.35,720.47 677.17,720.47 681.1,724.41 681.1,732.28 685.04,736.22 696.85,736.22 700.79,732.28 700.79,724.41 704.72,720.47 763.78,720.47 767.72,716.54 767.72,708.66 771.65,704.72 783.46,704.72 787.4,708.66 787.4,716.54 791.34,720.47 803.15,720.47 807.09,716.54 807.09,708.66 811.02,704.72 822.83,704.72 826.77,708.66 826.77,716.54 830.71,720.47 842.52,720.47 846.46,716.54 846.46,708.66 850.39,704.72 862.2,704.72 866.14,708.66 866.14,716.54 870.08,720.47 881.89,720.47 885.83,716.54 885.83,700.79 877.95,692.91 877.95,688.98 885.83,681.1 905.51,681.1 913.39,673.23 v1(952.76,673.23)
DDR3_DM0: U1.A1 U2.D3 | length 478.8
  Component Side w9.5: U2.D3@547.24,972.44 v1(562.99,988.19) ; v1(984.25,1019.68) U1.A1@1000,1035.43
  Inner Layer 1 w6: v1(562.99,988.19) 578.74,1003.94 968.5,1003.94 v1(984.25,1019.68)
DDR3_DM1: U1.F1 U2.E7 | length 452.5
  Component Side w9.5: U2.E7@673.23,940.94 v1(688.98,925.2) ; v1(984.25,893.7) U1.F1@1000,877.95
  Inner Layer 4 w6: v1(688.98,925.2) 704.72,909.45 763.78,909.45 767.72,913.39 767.72,925.2 771.65,929.13 783.46,929.13 787.4,925.2 787.4,893.7 791.34,889.76 803.15,889.76 807.09,893.7 807.09,925.2 811.02,929.13 822.83,929.13 826.77,925.2 826.77,913.39 830.71,909.45 968.5,909.45 v1(984.25,893.7)
DDR3_DQ0: U1.C3 U2.C8 | length 447.4
  Component Side w9.5: v1(688.98,988.19) U2.C8@704.72,1003.94 ; U1.C3@1062.99,972.44 v1(1078.74,988.19)
  Inner Layer 2 w6: v1(688.98,988.19) 704.72,972.44 1062.99,972.44 v1(1078.74,988.19)
DDR3_DQ1: U1.B3 U2.A7 | length 460.4
  Component Side w9.5: U2.A7@673.23,1066.93 v1(688.98,1082.68) ; U1.B3@1062.99,1003.94 v1(1078.74,1019.68)
  Inner Layer 4 w6: v1(688.98,1082.68) 704.72,1066.93 1031.5,1066.93 v1(1078.74,1019.68)
DDR3_DQ2: U1.A2 U2.A3 | length 510.3
  Component Side w9.5: U2.A3@547.24,1066.93 v1(562.99,1051.18) ; v1(1015.75,1051.18) U1.A2@1031.5,1035.43
  Inner Layer 1 w6: v1(562.99,1051.18) 578.74,1035.43 1000,1035.43 v1(1015.75,1051.18)
DDR3_DQ3: U1.A4 U2.A2 | length 604.8
  Component Side w9.5: U2.A2@515.75,1066.93 v1(531.5,1051.18) ; v1(1078.74,1051.18) U1.A4@1094.49,1035.43
  Inner Layer 1 w6: v1(531.5,1051.18) 547.24,1066.93 1062.99,1066.93 v1(1078.74,1051.18)
DDR3_DQ4: U1.D3 U2.D7 | length 415.9
  Component Side w9.5: U2.D7@673.23,972.44 v1(688.98,956.69) ; v1(1047.24,925.2) U1.D3@1062.99,940.94
  Inner Layer 2 w6: v1(688.98,956.69) 704.72,940.94 1031.5,940.94 v1(1047.24,925.2)
DDR3_DQ5: U1.D1 U2.C3 | length 539.5
  Component Side w9.5: U2.C3@547.24,1003.94 v1(562.99,1019.68) ; v1(984.25,956.69) U1.D1@1000,940.94
  Inner Layer 1 w6: v1(562.99,1019.68) 547.24,1003.94 547.24,976.38 551.18,972.44 968.5,972.44 v1(984.25,956.69)
DDR3_DQ6: U1.C1 U2.B8 | length 550.4
  Component Side w9.5: U2.B8@704.72,1035.43 v1(720.47,1019.68) ; v1(980.31,988.19) 992.04,976.46
  Inner Layer 2 w6: v1(720.47,1019.68) 736.22,1003.94 763.78,1003.94 767.72,1007.87 767.72,1019.68 771.65,1023.62 783.46,1023.62 787.4,1019.68 787.4,988.19 791.34,984.25 803.15,984.25 807.09,988.19 807.09,1019.68 811.02,1023.62 822.83,1023.62 826.77,1019.68 826.77,988.19 830.71,984.25 842.52,984.25 846.46,988.19 846.46,1019.68 850.39,1023.62 862.2,1023.62 866.14,1019.68 866.14,988.19 870.08,984.25 881.89,984.25 885.83,988.19 885.83,1019.68 889.76,1023.62 901.57,1023.62 905.51,1019.68 905.51,1007.87 909.45,1003.94 964.57,1003.94 v1(980.31,988.19)
DDR3_DQ7: U1.E1 U2.C2 | length 573.3
  Component Side w9.5: U2.C2@515.75,1003.94 v1(531.5,988.19) ; v1(984.25,925.2) U1.E1@1000,909.45
  Inner Layer 1 w6: v1(531.5,988.19) 531.5,925.2 547.24,909.45 929.13,909.45 944.88,925.2 v1(984.25,925.2)
DDR3_DQ8: U1.E2 U2.E3 | length 510.3
  Component Side w9.5: U2.E3@547.24,940.94 v1(562.99,925.2) ; v1(1015.75,925.2) U1.E2@1031.5,909.45
  Inner Layer 1 w6: v1(562.99,925.2) 578.74,940.94 1000,940.94 v1(1015.75,925.2)
DDR3_DQ9: U1.E3 U2.F7 | length 616.5
  Component Side w9.5: v1(657.48,893.7) U2.F7@673.23,909.45 ; v1(1047.24,893.7) U1.E3@1062.99,909.45
  Inner Layer 2 w6: v1(657.48,893.7) 673.23,909.45 763.78,909.45 767.72,913.39 767.72,925.2 771.65,929.13 783.46,929.13 787.4,925.2 787.4,893.7 791.34,889.76 803.15,889.76 807.09,893.7 807.09,925.2 811.02,929.13 822.83,929.13 826.77,925.2 826.77,893.7 830.71,889.76 842.52,889.76 846.46,893.7 846.46,925.2 850.39,929.13 862.2,929.13 866.14,925.2 866.14,913.39 870.08,909.45 1031.5,909.45 v1(1047.24,893.7)
DDR3_DQ10: U1.G3 U2.F8 | length 415.9
  Component Side w9.5: U2.F8@704.72,909.45 v1(720.47,893.7) ; U1.G3@1062.99,846.46 v1(1078.74,862.2)
  Inner Layer 1 w6: v1(720.47,893.7) 736.22,877.95 1062.99,877.95 v1(1078.74,862.2)
DDR3_DQ11: U1.H3 U2.F2 | length 634
  Component Side w9.5: v1(500,893.7) U2.F2@515.75,909.45 ; v1(1047.24,830.71) U1.H3@1062.99,814.96
  Inner Layer 3 w6: v1(500,893.7) 515.75,877.95 1027.56,877.95 1031.5,874.02 1031.5,846.46 v1(1047.24,830.71)
DDR3_DQ12: U1.J3 U2.H7 | length 489.6
  Component Side w9.5: v1(657.48,862.2) U2.H7@673.23,846.46 ; v1(1047.24,799.21) U1.J3@1062.99,783.46
  Inner Layer 4 w6: v1(657.48,862.2) 673.23,877.95 929.13,877.95 960.63,846.46 1027.56,846.46 1031.5,842.52 1031.5,814.96 v1(1047.24,799.21)
DDR3_DQ13: U1.H2 U2.G2 | length 554.9
  Component Side w9.5: U2.G2@515.75,877.95 v1(531.5,862.2) ; v1(1015.75,799.21) U1.H2@1031.5,814.96
  Inner Layer 3 w6: v1(531.5,862.2) 547.24,846.46 929.13,846.46 960.63,814.96 1000,814.96 v1(1015.75,799.21)
DDR3_DQ14: U1.H1 U2.H8 | length 640.1
  Component Side w9.5: v1(688.98,830.71) U2.H8@704.72,846.46 ; v1(984.25,830.71) U1.H1@1000,814.96
  Inner Layer 1 w6: v1(688.98,830.71) 704.72,814.96 732.28,814.96 736.22,818.9 736.22,842.52 740.16,846.46 751.97,846.46 755.91,842.52 755.91,799.21 759.84,795.28 771.65,795.28 775.59,799.21 775.59,862.2 779.53,866.14 791.34,866.14 795.28,862.2 795.28,799.21 799.21,795.28 811.02,795.28 814.96,799.21 814.96,862.2 818.9,866.14 830.71,866.14 834.65,862.2 834.65,850.39 838.58,846.46 968.5,846.46 v1(984.25,830.71)
DDR3_DQ15: U1.J1 U2.H3 | length 491.9
  Component Side w9.5: U2.H3@547.24,846.46 v1(562.99,830.71) ; v1(984.25,799.21) U1.J1@1000,783.46
  Inner Layer 4 w6: v1(562.99,830.71) 578.74,846.46 905.51,846.46 937.01,814.96 968.5,814.96 v1(984.25,799.21)
DDR3_DQS0_N: U1.B2 U2.B7 | length 415.9
  Component Side w9.5: v1(657.48,1019.68) U2.B7@673.23,1035.43 ; v1(1015.75,988.19) U1.B2@1031.5,1003.94
  Inner Layer 4 w6: v1(657.48,1019.68) 673.23,1003.94 1000,1003.94 v1(1015.75,988.19)
DDR3_DQS0_P: U1.C2 U2.C7 | length 415.9
  Component Side w9.5: v1(657.48,988.19) U2.C7@673.23,1003.94 ; v1(1015.75,956.69) U1.C2@1031.5,972.44
  Inner Layer 4 w6: v1(657.48,988.19) 673.23,972.44 1000,972.44 v1(1015.75,956.69)
DDR3_DQS1_N: U1.F2 U2.G3 | length 510.3
  Component Side w9.5: U2.G3@547.24,877.95 v1(562.99,893.7) ; v1(1015.75,893.7) U1.F2@1031.5,877.95
  Inner Layer 2 w6: v1(562.99,893.7) 578.74,877.95 1000,877.95 v1(1015.75,893.7)
DDR3_DQS1_P: U1.G2 U2.F3 | length 554.9
  Component Side w9.5: v1(531.5,893.7) U2.F3@547.24,909.45 ; v1(1015.75,830.71) U1.G2@1031.5,846.46
  Inner Layer 2 w6: v1(531.5,893.7) 578.74,846.46 1000,846.46 v1(1015.75,830.71)
DDR3_ODT: R6.1 U1.N5 U2.K1 | length 853.7
  Component Side w9.5: U2.K1@484.25,783.46 v1(500,767.72) ; v1(1110.24,673.23) U1.N5@1125.98,657.48
  Inner Layer 1 w6: v1(500,767.72) 515.75,751.97 515.75,740.16 511.81,736.22 488.19,736.22 484.25,732.28 484.25,724.41 488.19,720.47 511.81,720.47 515.75,716.54 515.75,708.66 511.81,704.72 488.19,704.72 484.25,700.79 484.25,692.91 488.19,688.98 854.33,688.98 885.83,657.48 1094.49,657.48 v1(1110.24,673.23)
DDR3_RAS#: R8.1 U1.P4 U2.J3 | length 670.1
  Component Side w9.5: U2.J3@547.24,814.96 v1(562.99,799.21) ; U1.P4@1094.49,625.98 v1(1110.24,641.73)
  Inner Layer 3 w6: v1(562.99,799.21) 641.73,720.47 822.83,720.47 917.32,625.98 1094.49,625.98 v1(1110.24,641.73)
DDR3_RESET#: R32.2 U1.B4 U2.T2
DDR3_WE#: R10.1 U1.M5 U2.L3 | length 617.9
  Component Side w9.5: U2.L3@547.24,751.97 v1(562.99,736.22) ; v1(1110.24,704.72) U1.M5@1125.98,688.98
  Inner Layer 1 w6: v1(562.99,736.22) 578.74,751.97 913.39,751.97 944.88,720.47 1094.49,720.47 v1(1110.24,704.72)
DONE: R40.1 U1.R11 | length 22.3
  Component Side w10: U1.R11@1314.96,594.49 v1(1330.71,578.74)
DVDDL: C119.2 C120.2 C121.2 L6.1 L7.1 U10.38
EN_3.3V_IO: C138.2 Q1.1 R78.2 R84.2
EXT_RST_N: J1.223 Q3.3 R197.2
GB_A_N: J1.172 U9.3
GB_A_P: J1.171 U9.2
GB_B_N: J1.175 U9.6
GB_B_P: J1.174 U9.5
GB_C_N: J1.178 U9.9
GB_C_P: J1.177 U9.8
GB_D_N: J1.181 U9.12
GB_D_P: J1.180 U9.11